# EAGLE board babelbabel (EAGLE 9.6.2), part 1 of 2
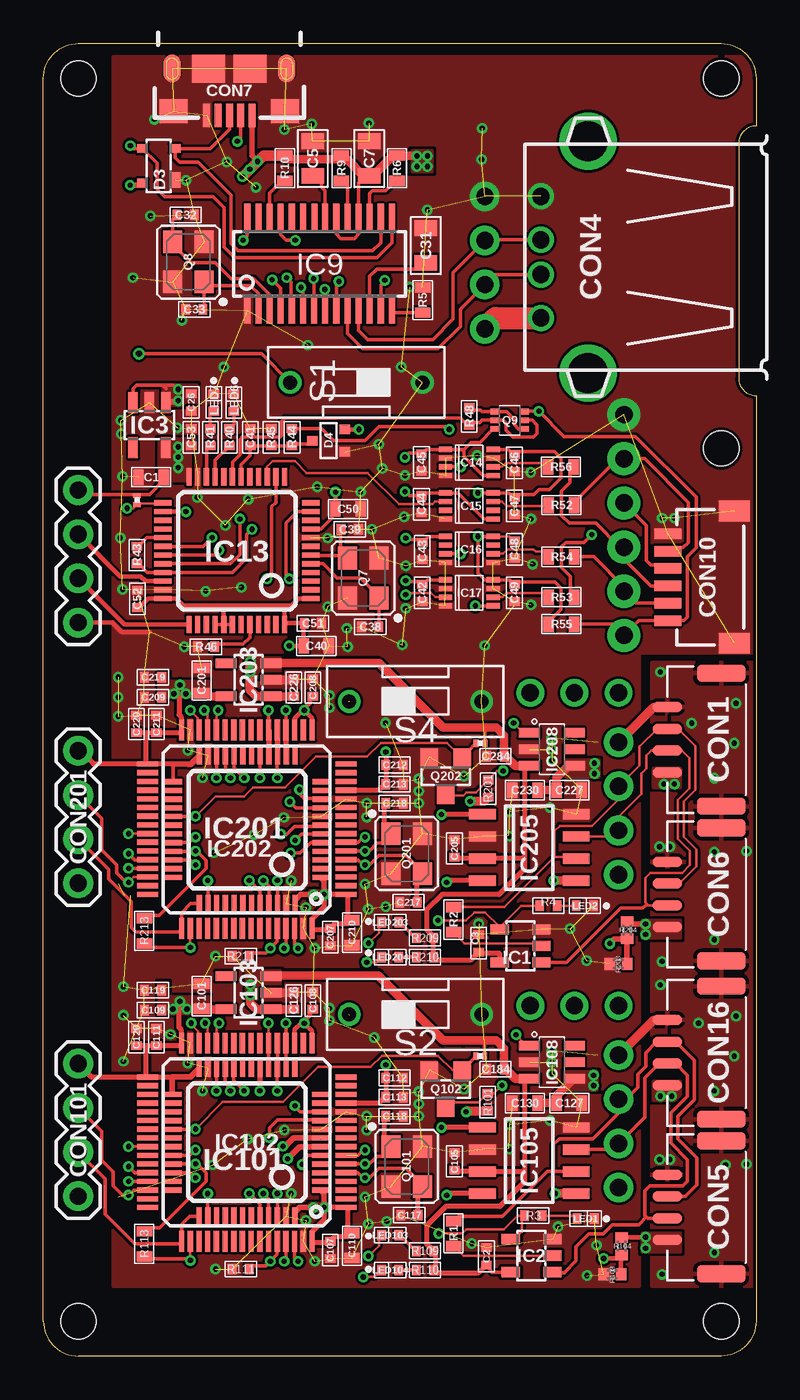
[diagram p0: board, top side]
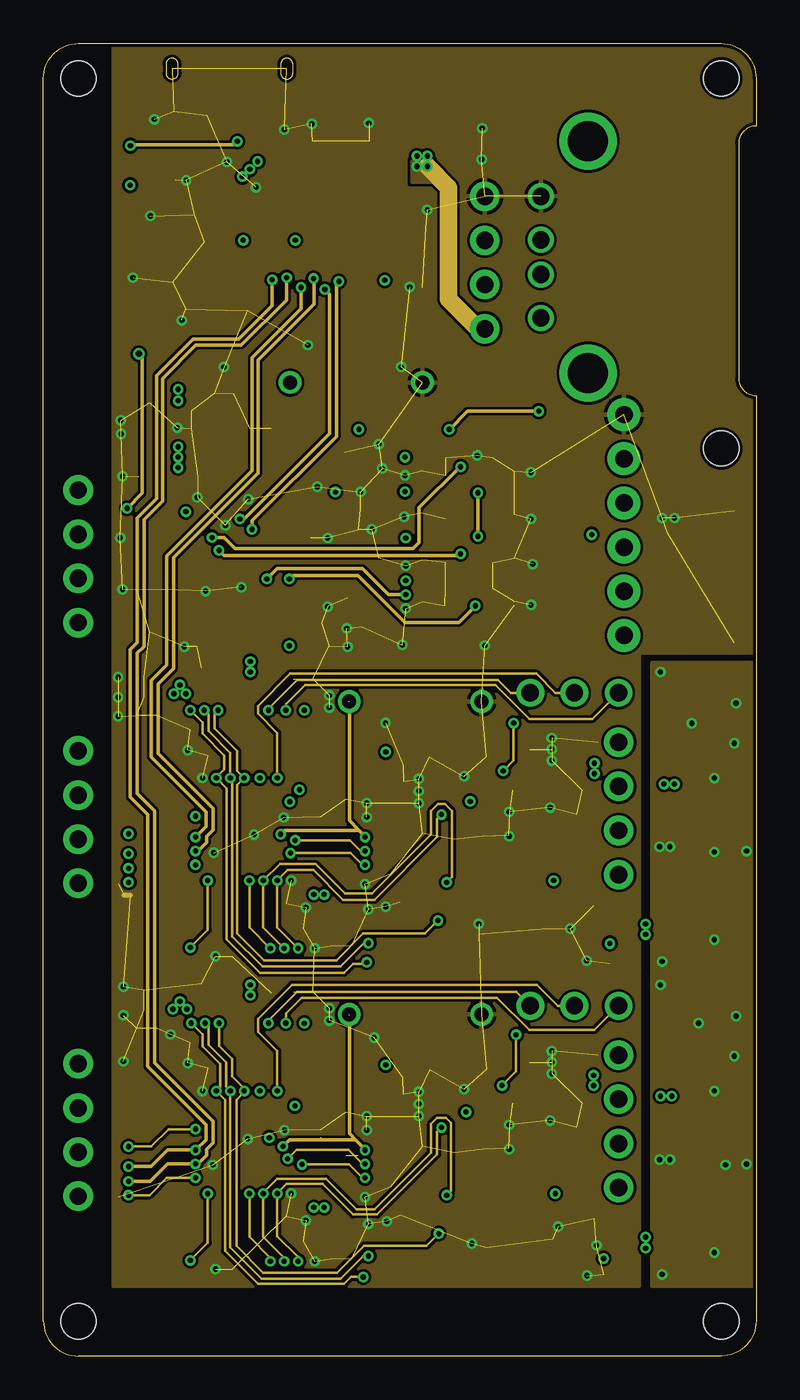
[diagram p1: board, inner layer Route2]
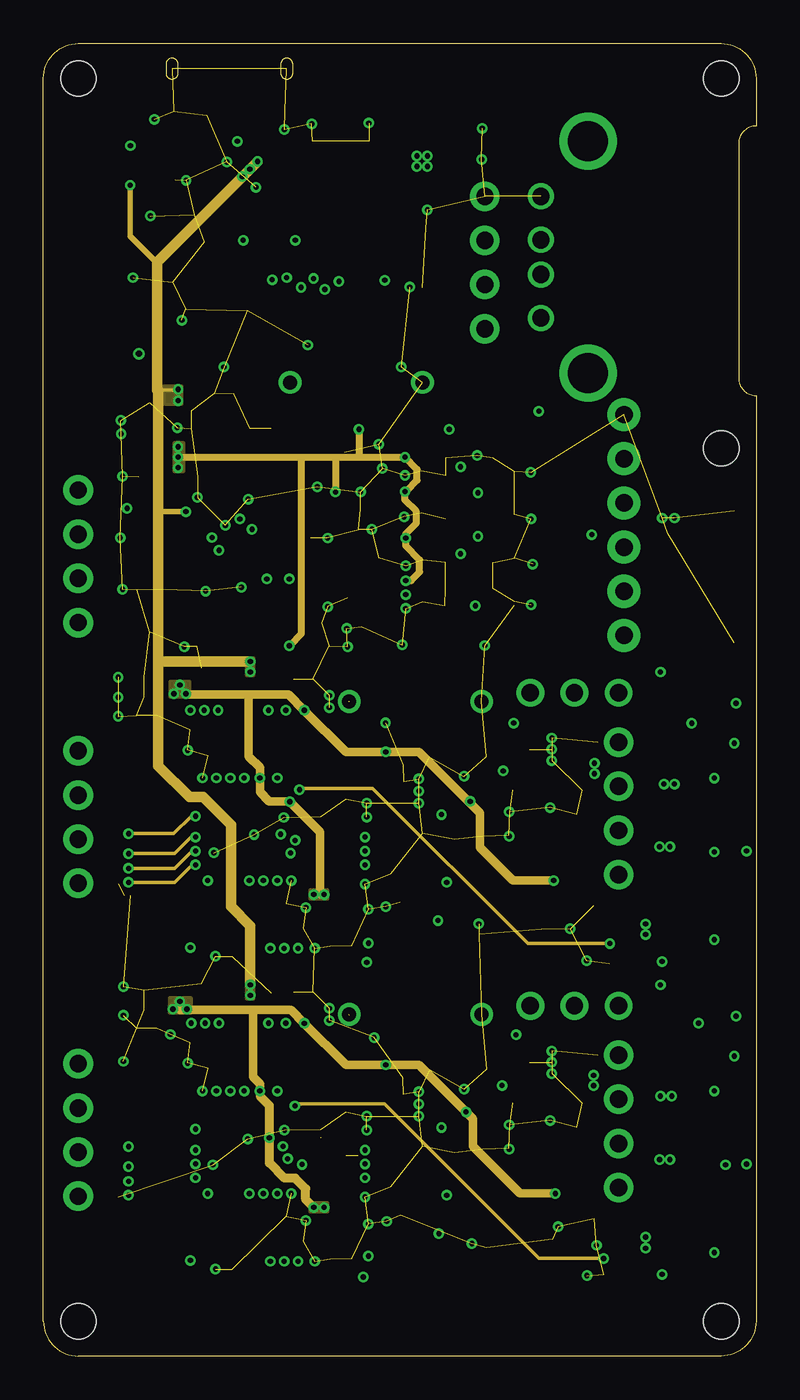
[diagram p2: board, inner layer Route15]
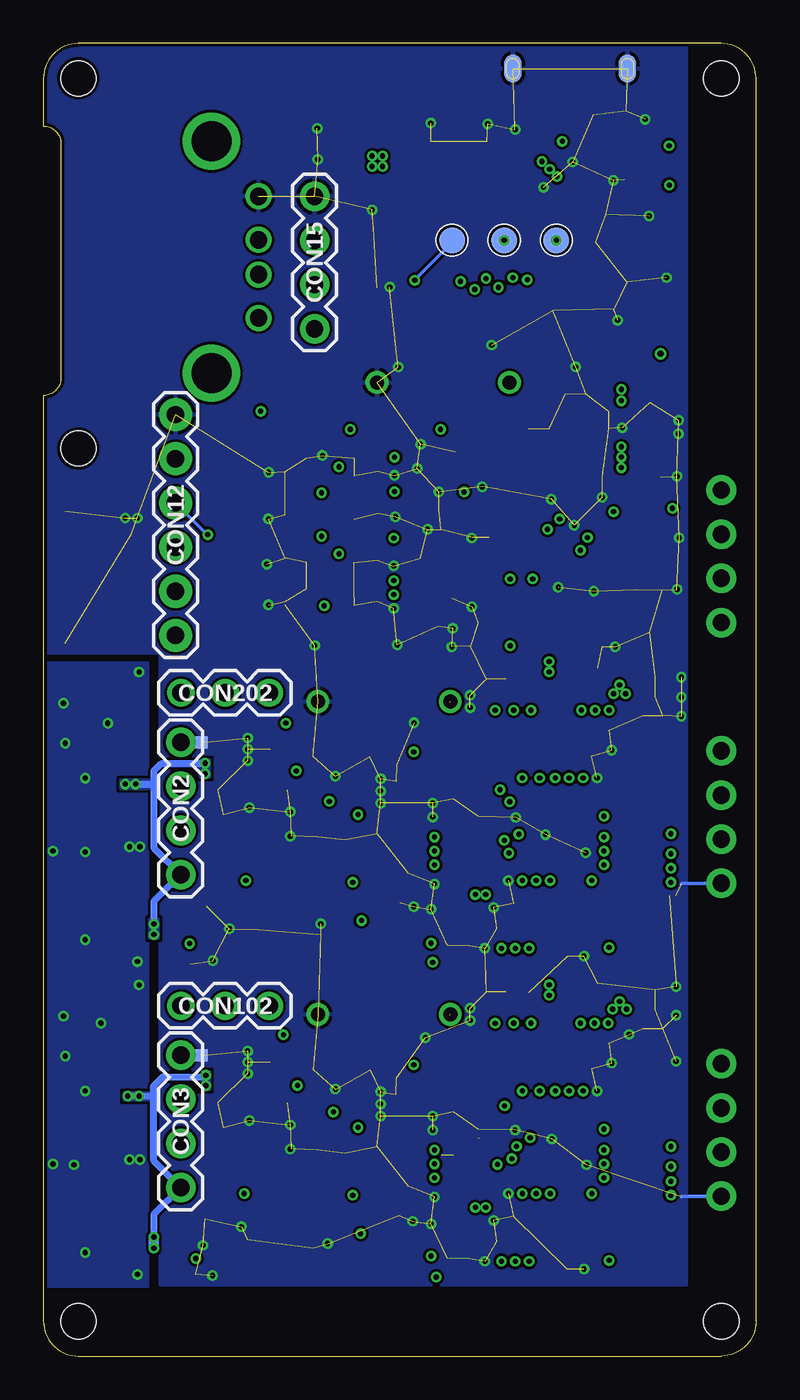
[diagram p3: board, bottom side, seen from below]

Size 41 x 75.5 mm. Coordinates in mm from the lower left corner, seen from the top.
Outline: 0,2 0,73.5 arc-90 2,75.5 39,75.5 arc-90 41,73.5 41,70.75 arc90 40,69.75 40,56.25 arc90 41,55.25 41,2 arc-90 39,0 2,0 arc-90 0,2
Copper layers (1+2*15+16): Top 0.035mm / dielectric 0.12mm / Route2 0.035mm / dielectric 0.7mm / Route15 0.035mm / dielectric 0.12mm / Bottom 0.035mm
Design rules "JLPCB *": minimum track width 0.15mm, minimum drill 0.15mm, track to track 0.15mm, track to pad 0.15mm, pad to pad 0.15mm, via to via 0.15mm, smd to smd 0.15mm, copper to edge 0.2mm, drill to drill 0.3mm, minimum pad ring 0.15mm, minimum via ring 0.15mm, stop-mask expansion 1mil, vias tented up to drill 0.41mm, thermal gap 8mil
Net classes: 1 usb: width 0.2 mm, drill 0.3 mm, clearance 0.2 mm
Holes 2 mm at 2,73.5 39,73.5 39,2 2,2 39,52.2
tRestrict: 2 lines

## Footprints (pad centres in the part's own frame; a part is rotated, then mirrored left to right if it is on the bottom)
C0603 = smd 0.6 x 0.9: 1 -0.725,0; 2 0.725,0
C0402 = smd 0.5 x 0.6: 1 -0.5,0; 2 0.5,0
C0805 = smd 0.9 x 1.3: 1 -1,0; 2 1,0
JST_GH-4P-RA = smd 0.6 x 1.7: 1 1.875,-2.91; 2 0.625,-2.91; 3 -0.625,-2.91; 4 -1.875,-2.91 | smd 1 x 2.8: M$0 -3.825,0.19; M$1 3.825,0.19
1X04-PTH-2.54 = drill 1 pad 1.7: 1 -3.81,0; 2 -1.27,0; 3 1.27,0; 4 3.81,0
USB-A-F-PTH = drill 1: D+ 1,5.37; D- -1,5.37; GND 3.5,5.37; VBUS -3.5,5.37 | drill 2.286: P$1 -6.67,2.66; P$2 6.67,2.66
MICRO_USB_PEGS = smd 0.4 x 1.35: D+ 0,2.68; D- -0.65,2.68; GND 1.3,2.68; ID 0.65,2.68; VBUS -1.3,2.68 | smd 1.9 x 1.6: GND1 -1.2,0; GND2 1.2,0 | smd 1.6 x 1.4: GND3 -3.2,2.45; GND4 3.2,2.45 | smd 1 x 1.6: P$1 -3.3,0; P$2 3.3,0 | smd 1 x 1.6 bottom: P$3 -3.3,0; P$4 3.3,0
SM06B = smd 0.6 x 1.55: 1 -2.5,2.275; 2 -1.5,2.275; 3 -0.5,2.275; 4 0.5,2.275; 5 1.5,2.275; 6 2.5,2.275 | smd 1.2 x 1.8: G1 -3.8,-1.55; G2 3.8,-1.55
1X06-PTH-2.54 = drill 1 pad 1.9: 1 -6.35,0; 2 -3.81,0; 3 -1.27,0; 4 1.27,0; 5 3.81,0; 6 6.35,0
1X03-PTH-2.54 = drill 1 pad 1.6: 1 -2.54,0; 2 0,0; 3 2.54,0
SOT143B = smd 0.6 x 0.9: 1 -0.95,0.8 | smd 0.6 x 0.5: 2 -0.95,-1; 3 0.95,-1; 4 0.95,1
SC70 = smd 0.55 x 0.6: 1 -0.65,-0.925; 2 0.65,-0.925; 3 0,0.925
SOT23-5L = smd 1.1 x 0.6: 1 1.2,-0.95; 2 1.2,0; 3 1.2,0.95; 4 -1.2,0.95; 5 -1.2,-0.95
SOT23-5 = smd 1.2 x 0.55: 1 1.3,-0.95; 2 1.3,0; 3 1.3,0.95; 4 -1.3,0.95; 5 -1.3,-0.95
SSOP-28 = smd 0.35 x 1.5: 1 -4.16,-2.7; 2 -3.52,-2.7; 3 -2.88,-2.7; 4 -2.24,-2.7; 5 -1.6,-2.7; 6 -0.96,-2.7; 7 -0.32,-2.7; 8 0.32,-2.7; 9 0.96,-2.7; 10 1.6,-2.7; 11 2.24,-2.7; 12 2.88,-2.7; 13 3.52,-2.7; 14 4.16,-2.7; 15 4.16,2.7; 16 3.52,2.7; 17 2.88,2.7; 18 2.24,2.7; 19 1.6,2.7; 20 0.96,2.7; 21 0.32,2.7; 22 -0.3,2.7; 23 -0.96,2.7; 24 -1.6,2.7; 25 -2.24,2.7; 26 -2.88,2.7; 27 -3.52,2.7; 28 -4.16,2.7
LQFP48 = smd 1 x 0.3: 1 -4.25,2.75; 2 -4.25,2.25; 3 -4.25,1.75; 4 -4.25,1.25; 5 -4.25,0.75; 6 -4.25,0.25; 7 -4.25,-0.25; 8 -4.25,-0.75; 9 -4.25,-1.25; 10 -4.25,-1.75; 11 -4.25,-2.25; 12 -4.25,-2.75; 25 4.25,-2.75; 26 4.25,-2.25; 27 4.25,-1.75; 28 4.25,-1.25; 29 4.25,-0.75; 30 4.25,-0.25; 31 4.25,0.25; 32 4.25,0.75; 33 4.25,1.25; 34 4.25,1.75; 35 4.25,2.25; 36 4.25,2.75 | smd 0.3 x 1: 13 -2.75,-4.25; 14 -2.25,-4.25; 15 -1.75,-4.25; 16 -1.25,-4.25; 17 -0.75,-4.25; 18 -0.25,-4.25; 19 0.25,-4.25; 20 0.75,-4.25; 21 1.25,-4.25; 22 1.75,-4.25; 23 2.25,-4.25; 24 2.75,-4.25; 37 2.75,4.25; 38 2.25,4.25; 39 1.75,4.25; 40 1.25,4.25; 41 0.75,4.25; 42 0.25,4.25; 43 -0.25,4.25; 44 -0.75,4.25; 45 -1.25,4.25; 46 -1.75,4.25; 47 -2.25,4.25; 48 -2.75,4.25
VSSOP8 = smd 0.75 x 0.3: 1 -1.375,0.75; 2 -1.375,0.25; 3 -1.375,-0.25; 4 -1.375,-0.75; 5 1.375,-0.75; 6 1.375,-0.25; 7 1.375,0.25; 8 1.375,0.75
TQFP64 = smd 0.3 x 1.2: 1 -3.75,-5.7; 2 -3.25,-5.7; 3 -2.75,-5.7; 4 -2.25,-5.7; 5 -1.75,-5.7; 6 -1.25,-5.7; 7 -0.75,-5.7; 8 -0.25,-5.7; 9 0.25,-5.7; 10 0.75,-5.7; 11 1.25,-5.7; 12 1.75,-5.7; 13 2.25,-5.7; 14 2.75,-5.7; 15 3.25,-5.7; 16 3.75,-5.7; 33 3.75,5.7; 34 3.25,5.7; 35 2.75,5.7; 36 2.25,5.7; 37 1.75,5.7; 38 1.25,5.7; 39 0.75,5.7; 40 0.25,5.7; 41 -0.25,5.7; 42 -0.75,5.7; 43 -1.25,5.7; 44 -1.75,5.7; 45 -2.25,5.7; 46 -2.75,5.7; 47 -3.25,5.7; 48 -3.75,5.7 | smd 1.2 x 0.3: 17 5.7,-3.75; 18 5.7,-3.25; 19 5.7,-2.75; 20 5.7,-2.25; 21 5.7,-1.75; 22 5.7,-1.25; 23 5.7,-0.75; 24 5.7,-0.25; 25 5.7,0.25; 26 5.7,0.75; 27 5.7,1.25; 28 5.7,1.75; 29 5.7,2.25; 30 5.7,2.75; 31 5.7,3.25; 32 5.7,3.75; 49 -5.7,3.75; 50 -5.7,3.25; 51 -5.7,2.75; 52 -5.7,2.25; 53 -5.7,1.75; 54 -5.7,1.25; 55 -5.7,0.75; 56 -5.7,0.25; 57 -5.7,-0.25; 58 -5.7,-0.75; 59 -5.7,-1.25; 60 -5.7,-1.75; 61 -5.7,-2.25; 62 -5.7,-2.75; 63 -5.7,-3.25; 64 -5.7,-3.75
SOIC8 = smd 1.55 x 0.6: 1 -2.7,1.905; 2 -2.7,0.635; 3 -2.7,-0.635; 4 -2.7,-1.905; 5 2.7,-1.905; 6 2.7,-0.635; 7 2.7,0.635; 8 2.7,1.905
SOT26 = smd 1.2 x 0.55: 1 -1.3,0.95; 2 -1.3,0; 3 -1.3,-0.95; 4 1.3,-0.95; 5 1.3,0; 6 1.3,0.95
CONNECTION = smd 0.7 x 0.7: P$1 -0.35,0; P$2 0.35,0
LED0402 = smd 0.5 x 0.6: A -0.5,0; C 0.5,0
2х2 = smd 1.5 x 1.5: P$1 0,0
OSCILLATOR-3.2X2.5-4P = smd 1.3 x 1.1: 1 -1.15,-0.9; 2 1.15,-0.9; 3 1.15,0.9; 4 -1.15,0.9
SOT-563 = smd 0.5 x 0.325: 1 -0.85,0.5; 2 -0.85,0; 3 -0.85,-0.5; 4 0.85,-0.5; 5 0.85,0; 6 0.85,0.5
SOT23 = smd 1 x 1: 1 1.1,-0.95; 2 1.1,0.95; 3 -1.1,0
R0603 = smd 0.6 x 0.9: 1 -0.725,0; 2 0.725,0
R0402 = smd 0.5 x 0.6: 1 -0.5,0; 2 0.5,0
R0201 = smd 0.28 x 0.43: 1 -0.255,0; 2 0.255,0
R0402' = smd 0.6 x 0.7: 1 -0.5,0; 2 0.5,0
DS-01 = drill 0.8 pad 1.3: 1 0,-3.81; 10 0,3.81

## Placement (x,y rotation side)
C1  4.7uF  [C0603]  6.2,50.55 0 top
C2  0.1uF  [C0402]  25.49,5.74 270 top
C3  0.1uF  [C0402]  25.05,23.74 270 top
C5  10uF  [C0805]  15.49,68.88 270 top
C7  10uF  [C0805]  18.74,68.88 270 top
C26  1uF  [C0402]  8.5,54.85 90 top
C31  10uF  [C0805]  22,63.88 270 top
C32  20pF  [C0402]  8.18,65.64 180 top
C33  20pF  [C0402]  8.68,60.21 0 top
C38  10pF  [C0402]  18.8,41.95 180 top
C39  10pF  [C0402]  17.62,47.55 0 top
C40  4.7uF  [C0603]  15.7,40.85 0 top
C41  0.1uF  [C0402]  11.9,52.85 270 top
C42  0.1uF  [C0402]  21.8,43.9 270 top
C43  0.1uF  [C0402]  21.8,46.3 270 top
C44  0.1uF  [C0402]  21.75,49 270 top
C45  0.1uF  [C0402]  21.75,51.4 270 top
C46  0.1uF  [C0402]  27.1,51.38 90 top
C47  0.1uF  [C0402]  27.1,48.9 90 top
C48  0.1uF  [C0402]  27.1,46.4 90 top
C49  0.1uF  [C0402]  27.1,43.9 90 top
C50  4.7uF  [C0603]  17.52,48.73 180 top
C51  0.1uF  [C0402]  15.5,42.15 0 top
C52  0.1uF  [C0402]  5.4,43.55 270 top
C53  0.1uF  [C0402]  8.5,52.85 90 top
C101  4.7uF  [C0603]  9.1,20.7 270 top
C105  0.1uF  [C0402]  23.65,11.2 270 top
C107  0.1uF  [C0402]  16.5,6.1 270 top
C108  0.1uF  [C0402]  15.5,20.45 90 top
C109  10nF  [C0402]  6.3,19.9 0 top
C110  4.7uF  [C0603]  17.75,6.35 270 top
C111  10nF  [C0402]  6.5,18.35 270 top
C112  1uF  [C0402]  20.2,16 180 top
C113  10nF  [C0402]  20.2,14.9 180 top
C117  20pF  [C0402]  21.05,8.1 0 top
C118  20pF  [C0402]  20.2,13.8 180 top
C119  1uF  [C0402]  6.3,21.05 0 top
C120  1uF  [C0402]  5.35,18.35 270 top
C126  1uF  [C0402]  14.4,20.45 270 top
C127  4.7uF  [C0603]  30.25,14.55 180 top
C130  4.7uF  [C0603]  27.7,14.55 0 top
C184  0.1uF  [C0402]  26,16.5 180 top
C201  4.7uF  [C0603]  9.1,38.85 270 top
C205  0.1uF  [C0402]  23.65,29.2 270 top
C207  0.1uF  [C0402]  16.5,24.1 270 top
C208  0.1uF  [C0402]  15.5,38.45 90 top
C209  10nF  [C0402]  6.3,37.9 0 top
C210  4.7uF  [C0603]  17.75,24.35 270 top
C211  10nF  [C0402]  6.5,36.35 270 top
C212  1uF  [C0402]  20.2,34 180 top
C213  10nF  [C0402]  20.2,32.9 180 top
C217  20pF  [C0402]  21,26.1 0 top
C218  20pF  [C0402]  20.2,31.8 180 top
C219  1uF  [C0402]  6.3,39.05 0 top
C220  1uF  [C0402]  5.35,36.35 270 top
C226  1uF  [C0402]  14.4,38.45 270 top
C227  4.7uF  [C0603]  30.25,32.55 180 top
C230  4.7uF  [C0603]  27.7,32.55 0 top
C284  0.1uF  [C0402]  26,34.5 180 top
CON1  CON-4P-TABS-JST_GH-RA  [JST_GH-4P-RA]  38.8,35.45 270 top
CON2  PINHEAD_1X04-2.54  [1X04-PTH-2.54]  33.1,31.5 90 bottom
CON3  PINHEAD_1X04-2.54  [1X04-PTH-2.54]  33.1,13.5 90 bottom
CON4  USB-AA-PTH  [USB-A-F-PTH]  33.99,63.21 90 top
CON5  CON-4P-TABS-JST_GH-RA  [JST_GH-4P-RA]  38.8,8.55 270 top
CON6  CON-4P-TABS-JST_GH-RA  [JST_GH-4P-RA]  38.8,26.55 270 top
CON7  USB-1  [MICRO_USB_PEGS]  10.7,74.05 180 top
CON10  CON-6P-SM06B  [SM06B]  38.2,44.8 90 top
CON11  PINHEAD_1X04-2.54  [1X04-PTH-2.54]  2,46 90 top
CON12  PINHEAD_1X06-2.54  [1X06-PTH-2.54]  33.4,47.8 90 bottom
CON15  PINHEAD_1X04-2.54  [1X04-PTH-2.54]  25.4,62.9 90 bottom
CON16  CON-4P-TABS-JST_GH-RA  [JST_GH-4P-RA]  38.8,17.45 270 top
CON101  PINHEAD_1X04-2.54  [1X04-PTH-2.54]  2,13 90 top  (not fitted)
CON102  PINHEAD_1X03-2.54  [1X03-PTH-2.54]  30.55,20.15 180 bottom  (not fitted)
CON201  PINHEAD_1X04-2.54  [1X04-PTH-2.54]  2,31 90 top  (not fitted)
CON202  PINHEAD_1X03-2.54  [1X03-PTH-2.54]  30.55,38.15 180 bottom  (not fitted)
D3  PRTR5V0U2X  [SOT143B]  6.63,68.46 180 top
D4  BAT54SWT1G  [SC70]  16.4,52.65 90 top
IC1  NS5B1G385  [SOT23-5L]  27.45,23.59 0 top
IC2  NS5B1G385  [SOT23-5L]  28.08,5.77 0 top
IC3  AP2127-3.3  [SOT23-5]  6.1,53.55 90 top
IC9  FE1.1S  [SSOP-28]  15.89,62.83 0 top
IC13  STM32F103CBT7  [LQFP48]  11.12,46.33 180 top
IC14  74LVC2T45  [VSSOP8]  24.5,51.4 0 top
IC15  74LVC2T45  [VSSOP8]  24.5,48.9 0 top
IC16  74LVC2T45  [VSSOP8]  24.5,46.4 0 top
IC17  74LVC2T45  [VSSOP8]  24.5,43.9 0 top
IC101  STM32F373CBT6-LQFP48  [LQFP48]  11.71,12.3 180 top
IC102  STM32F373RCT6  [TQFP64]  11.7,12.3 90 top  (not fitted)
IC103  AP2127-3.3  [SOT23-5]  11.8,20.9 0 top
IC105  TJA1051-SO8  [SOIC8]  27.95,11.25 0 top
IC108  TPD3S014DBVR-SOT23-6  [SOT26]  29.25,16.9 0 top
IC201  STM32F373CBT6-LQFP48  [LQFP48]  11.72,30.28 180 top
IC202  STM32F373RCT6  [TQFP64]  11.7,30.3 90 top  (not fitted)
IC203  AP2127-3.3  [SOT23-5]  11.8,38.9 0 top
IC205  TJA1051-SO8  [SOIC8]  27.95,29.25 0 top
IC208  TPD3S014DBVR-SOT23-6  [SOT26]  29.25,34.9 0 top
J1  CONNECTION-SMD  [CONNECTION]  32.25,17.3 180 bottom
J2  CONNECTION-SMD  [CONNECTION]  32.25,35.3 180 bottom
LED1  LED-0402  [LED0402]  31.2,7.9 0 top
LED2  LED-0402  [LED0402]  31.15,25.9 0 top
LED6  LED-0402  [LED0402]  10.96,54.84 90 top
LED7  LED-0402  [LED0402]  9.81,54.85 90 top
LED103  LED-0402  [LED0402]  19.95,6.95 180 top
LED104  LED-0402  [LED0402]  19.95,4.95 180 top
LED203  LED-0402  [LED0402]  19.95,24.95 180 top
LED204  LED-0402  [LED0402]  19.95,22.95 180 top
PAD1  PAD-S_2X2  [2х2]  17.49,64.18 270 bottom
PAD2  PAD-S_2X2  [2х2]  11.49,64.18 270 bottom
PAD4  PAD-S_2X2  [2х2]  14.49,64.18 270 bottom
Q7  8MHz  [OSCILLATOR-3.2X2.5-4P]  18.4,44.75 90 top
Q8  12MHz  [OSCILLATOR-3.2X2.5-4P]  8.34,62.93 90 top
Q9  NTZD3152PT1G  [SOT-563]  26.82,53.83 0 top
Q101  16MHz  [OSCILLATOR-3.2X2.5-4P]  20.9,10.9 270 top
Q102  2N7002  [SOT23]  23.15,15.35 90 top
Q201  16MHz  [OSCILLATOR-3.2X2.5-4P]  20.9,28.9 270 top
Q202  2N7002  [SOT23]  23.15,33.35 90 top
R1  120R  [R0603]  23.6,7.05 90 top
R2  120R  [R0603]  23.6,25.1 90 top
R3  1K  [R0402]  28.18,8.08 180 top
R4  1K  [R0402]  29.05,25.9 180 top
R5  2.7K  [R0603]  21.82,60.74 270 top
R6  100K  [R0603]  20.34,68.33 90 top
R8  10k  [R0201]  5.39,49.24 90 top
R9  100K  [R0603]  17.14,68.33 90 top
R10  100K  [R0603]  13.89,68.33 90 top
R40  1K  [R0402]  10.7,52.85 270 top
R41  1K  [R0402]  9.6,52.85 270 top
R43  1K5  [R0402]  5.38,46.08 270 top
R44  4K7  [R0402]  14.3,52.85 90 top
R45  10K  [R0402]  13.1,52.85 270 top
R46  10K  [R0402]  9.35,40.8 180 top
R48  10K  [R0402]  24.5,54.05 270 top
R52  120R  [R0603]  29.8,48.95 0 top
R53  120R  [R0603]  29.8,43.65 0 top
R54  120R  [R0603]  29.8,45.98 0 top
R55  120R  [R0603]  29.8,42.1 0 top
R56  120R  [R0603]  29.77,51.15 0 top
R101  10K  [R0402]  25.56,14.61 270 top
R102  10k  [R0201]  25.13,17.25 0 top
R103  10k  [R0402']  32.73,4.7 180 top
R104  10k  [R0402']  33.26,6.32 270 top
R109  1K  [R0402]  21.95,6.05 0 top
R110  1K  [R0402]  21.95,4.95 0 top
R111  10K  [R0402]  11.35,5 0 top
R113  1K5  [R0603]  5.8,6.45 270 top
R201  10K  [R0402]  25.58,32.64 270 top
R202  10k  [R0201]  25.14,35.25 0 top
R203  10k  [R0402']  33.07,22.56 180 top
R204  10k  [R0402']  33.58,24.5 270 top
R209  1K  [R0402]  21.95,24.05 0 top
R210  1K  [R0402]  21.95,22.95 0 top
R211  10K  [R0402]  11.35,23 0 top
R213  1K5  [R0603]  5.8,24.45 270 top
S1  DS01-STRAIGHT  [DS-01]  18,56 90 top
S2  DS01-STRAIGHT  [DS-01]  21.4,19.65 270 top
S4  DS01-STRAIGHT  [DS-01]  21.4,37.65 270 top

## Library data of the parts
C1 C40 C50 C101 C110 C127 C130 C201 C210 C227 C230 = rc; LCSC#: C19666; PACKAGE: 0603
C2 C3 C41-C49 C51-C53 C105 C107 C108 C184 C205 C207 C208 C284 = rc; LCSC#: C1525; PACKAGE: 0402
C5 C7 C31 = rc; LCSC#: C15850; PACKAGE: 0805
C26 C112 C119 C120 C126 C212 C219 C220 C226 = rc; LCSC#: C52923; PACKAGE: 0402
C32 C33 C117 C118 C217 C218 = rc; LCSC#: C1554; PACKAGE: 0402
C38 C39 = rc; LCSC#: C32949; PACKAGE: 0402
C109 C111 C113 C209 C211 C213 = rc; LCSC#: C15195; PACKAGE: 0402
CON1 CON5 CON6 CON16 = Connectors; AEC-Q: ---; DIGIKEY#: 455-1566-1-ND; LCSC#: C189895; MANF: JST Sales America Inc; MANF#: SM04B-GHS-TB(LF)(SN); OPERATING_TEMP: -25°C ~ 85°C
CON2 CON3 CON11 CON12 CON15 CON101 CON102 CON201 CON202 = pinhead
CON4 = Connectors; DIGIKEY#: 2092-KUSBX-AS1N-W-ND; MANF: Kycon, Inc.; MANF#: KUSBX-AS1N-W
CON7 = Connectors; DIGIKEY#: 609-4616-1-ND; LCSC#: C132562; MANF: FCI; MANF#: 10118193-0001LF
CON10 = Connectors; DIGIKEY#: 455-1806-1-ND; LCSC#: C160405; MANF: JST Sales America Inc; MANF#: SM06B-SRSS-TB(LF)(SN)
D3 = TVS_diodes; DIGIKEY#: 568-4140-2-ND; LCSC#: C12333; MANF: NXP USA Inc; MANF#: PRTR5V0U2X,215
D4 = Diodes; LCSC#: C78260; MANF: ON Semiconductor; MANF#: BAT54SWT1G
IC1 IC2 = misc; DIGIKEY#: 1727-6763-1-ND; LCSC#: C554311; MANF: Nexperia USA Inc.; MANF#: 74AHC1G66GV,125
IC3 IC103 IC203 = linear regulators; DIGIKEY#: AP2127K-3.3TRG1DITR-ND; I_MAX: 300mA; LCSC#: C156285; MANF: Diodes Incorporated; MANF#: AP2127K-3.3TRG1; V_MAX: 6V
IC9 = misc; LCSC#: C9359; MANF: Terminus Tech; MANF#: FE1.1S
IC13 = stm32; DIGIKEY#: 497-11518-ND; LCSC#: C8304; MANF: STMicroelectronics; MANF#: STM32F103CBT7
IC14-IC17 = misc; ALTERNATIVE: 74LVC2T45DC-Q100H; DIGIKEY#: 1727-4578-2-ND; LCSC#: C139382; MANF: Nexperia USA Inc; MANF#: 74LVC2T45DC,125
IC101 IC201 = stm32; DIGIKEY#: 497-13309-ND; MANF: STMicroelectronics; MANF#: STM32F373CBT6
IC102 IC202 = stm32; DIGIKEY#: 497-13252-ND; LCSC#: C84174; MANF: STMicroelectronics; MANF#: STM32F373RCT6
IC105 IC205 = serial_interfaces; DIGIKEY#: 568-8684-2-ND; LCSC#: C38695; MANF: NXP USA Inc; MANF#: TJA1051T/3,118
IC108 IC208 = misc; DIGIKEY#: 296-38835-1-ND; LCSC#: C87384; MANF: Texas Instruments; MANF#: TPD3S014DBVR
J1 J2 = misc; BOM: EXCLUDE
LED1 LED2 LED7 LED103 LED203 = rc; COLOR: RED; LCSC#: C74339
LED6 LED104 LED204 = rc; COLOR: GREEN; LCSC#: C74338
PAD1 PAD2 PAD4 = PADS; BOM: EXCLUDE
Q7 = crystal; LCSC#: C133366; LOAD_CAPACITANCE: 10pF
Q8 = crystal; LCSC#: C9002; LOAD_CAPACITANCE: 20pF
Q9 = mosfet; DIGIKEY#: NTZD3152PT1GOSCT-ND; LCSC#: C393372; MANF: ON Semiconductor; MANF#: NTZD3152PT1G; PACKAGE: SOT-563
Q101 Q201 = crystal; LCSC#: C164049; LOAD_CAPACITANCE: 20pF
Q102 Q202 = mosfet; LCSC#: C8545; MANF: Changjiang Electronics Tech (CJ); MANF#: 2N7002; PACKAGE: SOT23
R1 R2 R52-R56 = rc; LCSC#: C22787; PACKAGE: 0603; TOLERANCE: 1%
R3 R4 R40 R41 R109 R110 R209 R210 = rc; LCSC#: C11702; PACKAGE: 0402; TOLERANCE: 1%
R5 = rc; LCSC#: C13167; PACKAGE: 0603; TOLERANCE: 1%
R6 R9 R10 = rc; LCSC#: C25803; PACKAGE: 0603; TOLERANCE: 1%
R8 R102 R202 = rcl; MANF: YAGEO; MANF#: RC0201FR-0710KL; PACKAGE: 0201; SPICEPREFIX: R
R43 = rc; LCSC#: C25867; PACKAGE: 0402; TOLERANCE: 1%
R44 = rc; LCSC#: C25900; PACKAGE: 0402; TOLERANCE: 1%
R45 R46 R48 R101 R111 R201 R211 = rc; LCSC#: C25744; PACKAGE: 0402; TOLERANCE: 1%
R103 R104 R203 R204 = rcl; MANF: YAGEO; MANF#: RP0402FRE0710KL; PACKAGE: 0402; SPICEPREFIX: R
R113 R213 = rc; MANF: Panasonic; MANF#: ERJ-3EKF1501V; PACKAGE: 0603; TOLERANCE: 1%
S1 S2 S4 = misc; LCSC#: C319063; MANF: XKB Connectivity; MANF#: DS-01RP

## Nets
BABEL1:BOOT0: IC101.44 IC102.60 R111.2
BABEL1:CAN_COMM: IC101.22 IC102.30 LED104.C
BABEL1:CAN_RX: IC101.45 IC102.61 IC105.4
BABEL1:CAN_STATUS: IC101.21 IC102.29 LED103.C
BABEL1:CAN_TX: IC101.46 IC102.62 IC105.1
BABEL1:CAN_VDD_EN: IC101.29 IC102.41 Q102.1 R102.1
BABEL1:N$1: IC108.1 Q102.3 R101.1
BABEL1:N$4: IC101.10 R103.1 R104.2
BABEL1:N$27: LED103.A R109.1
BABEL1:N$28: LED104.A R110.1
BABEL1:PA4: CON102.3 IC101.14 IC102.20
BABEL1:PA5: CON102.2 IC101.15 IC102.21
BABEL1:PA6: CON102.1 IC101.16 IC102.22
BABEL1:PF0: C117.2 IC101.5 IC102.5 Q101.3
BABEL1:PF1: C118.2 IC101.6 IC102.6 Q101.1
BABEL1:SWCLK: CON101.2 IC101.37 IC102.49
BABEL1:SWDIO: CON101.3 IC101.34 IC102.46
BABEL1:USB_PU: IC101.38 IC102.50 R113.2
BABEL1:VDD_3V3: C101.2 C107.1 C108.1 C109.2 C110.1 C111.2 C112.2 C113.2 C119.2 C120.2 CON101.4 IC101.1 IC101.9 IC101.17 IC101.24 IC101.25 IC101.48 IC102.1 IC102.13 IC102.17 IC102.19 IC102.32 IC102.33 IC102.64 IC103.5 IC105.5 R101.2
BABEL1_RST: IC101.7 IC102.7 S2.1
BABEL1_RST1: IC201.7 IC202.7 S4.1
BABEL1_TERM: IC2.4 IC101.20 IC102.28 R3.2
BABEL1_USB_N: IC9.4 IC101.32 IC102.44
BABEL1_USB_P: IC9.5 IC101.33 IC102.45 R113.1
BABEL2:BOOT0: IC201.44 IC202.60 R211.2
BABEL2:CAN_COMM: IC201.22 IC202.30 LED204.C
BABEL2:CAN_RX: IC201.45 IC202.61 IC205.4
BABEL2:CAN_STATUS: IC201.21 IC202.29 LED203.C
BABEL2:CAN_TX: IC201.46 IC202.62 IC205.1
BABEL2:CAN_VDD_EN: IC201.29 IC202.41 Q202.1 R202.1
BABEL2:N$1: IC208.1 Q202.3 R201.1
BABEL2:N$4: IC201.10 R203.1 R204.2
BABEL2:N$27: LED203.A R209.1
BABEL2:N$28: LED204.A R210.1
BABEL2:PA4: CON202.3 IC201.14 IC202.20
BABEL2:PA5: CON202.2 IC201.15 IC202.21
BABEL2:PA6: CON202.1 IC201.16 IC202.22
BABEL2:PF0: C217.2 IC201.5 IC202.5 Q201.3
BABEL2:PF1: C218.2 IC201.6 IC202.6 Q201.1
BABEL2:SWCLK: CON201.2 IC201.37 IC202.49
BABEL2:SWDIO: CON201.3 IC201.34 IC202.46
BABEL2:USB_PU: IC201.38 IC202.50 R213.2
BABEL2:VDD_3V3: C201.2 C207.1 C208.1 C209.2 C210.1 C211.2 C212.2 C213.2 C219.2 C220.2 CON201.4 IC201.1 IC201.9 IC201.17 IC201.24 IC201.25 IC201.48 IC202.1 IC202.13 IC202.17 IC202.19 IC202.32 IC202.33 IC202.64 IC203.5 IC205.5 R201.2
BABEL2_TERM: IC1.4 IC201.20 IC202.28 R4.2
BABEL2_USB_N: IC9.6 IC201.32 IC202.44
BABEL2_USB_P: IC9.7 IC201.33 IC202.45 R213.1
CAN1_VDD: C127.2 C130.2 CON3.1 CON5.1 CON16.1 IC108.4 R104.1
CAN1_VDD1: C227.2 C230.2 CON1.1 CON2.1 CON6.1 IC208.4 R204.1
CAN_L: IC2.2 R1.1
CANH1: CON3.2 CON5.2 CON16.2 IC2.1 IC105.7
CANH2: CON1.2 CON2.2 CON6.2 IC1.1 IC205.7
CANL1: CON3.3 CON5.3 CON16.3 IC105.6 R1.2
CANL2: CON1.3 CON2.3 CON6.3 IC205.6 R2.2
CONSOLE_RX: CON10.3 CON12.3 R56.2
CONSOLE_TX: CON10.2 CON12.2 R54.2
DCP_DM: IC9.8 IC13.32
DCP_DP: IC9.9 IC13.33 R43.2
DUT_DM: CON4.D- CON15.2 IC9.10
DUT_DP: CON4.D+ CON15.3 IC9.11
GND: C1.1 C2.1 C3.1 C5.1 C7.1 C26.1 C31.1 C32.1 C33.1 C38.2 C39.2 C40.2 C41.1 C42.2 C43.2 C44.2 C45.2 C46.1 C47.1 C48.1 C49.1 C50.1 C51.2 C52.1 C53.2 C101.1 C105.1 C107.2 C108.2 C109.1 C110.2 C111.1 C112.1 C113.1 C117.1 C118.1 C119.1 C120.1 C126.1 C127.1 C130.1 C184.2 C201.1 C205.1 C207.2 C208.2 C209.1 C210.2 C211.1 C212.1 C213.1 C217.1 C218.1 C219.1 C220.1 C226.1 C227.1 C230.1 C284.2 CON4.GND CON7.GND CON7.GND1 CON7.GND2 CON7.GND3 CON7.GND4 CON7.P$1 CON7.P$2 CON7.P$3 CON7.P$4 CON10.6 CON10.G1 CON10.G2 CON11.1 CON12.6 CON15.4 CON101.1 CON201.1 D3.1 D4.1 IC1.3 IC2.3 IC3.2 IC9.1 IC13.8 IC13.23 IC13.35 IC14.2 IC14.4 IC14.7 IC15.4 IC16.4 IC16.5 IC17.2 IC17.4 IC17.7 IC101.8 IC101.23 IC101.47 IC102.12 IC102.31 IC102.63 IC103.2 IC105.2 IC105.8 IC108.2 IC201.8 IC201.23 IC201.47 IC202.12 IC202.31 IC202.63 IC203.2 IC205.2 IC205.8 IC208.2 J1.P$1 J2.P$1 LED1.C LED2.C LED6.C LED7.C Q7.2 Q7.4 Q8.2 Q8.4 Q101.2 Q101.4 Q102.2 Q201.2 Q201.4 Q202.2 R5.1 R45.1 R46.2 R103.2 R111.1 R203.2 R211.1 S1.1 S2.10 S4.10
GNDD: CON1.4 CON1.M$0 CON1.M$1 CON2.4 CON3.4 CON5.4 CON5.M$0 CON5.M$1 CON6.4 CON6.M$0 CON6.M$1 CON16.4 CON16.M$0 CON16.M$1 J1.P$2 J2.P$2
IRXD: IC13.31 IC16.3
ITCK: IC13.15 IC15.2
ITMS: IC13.14 IC17.3
ITMS_DIR: IC13.11 IC17.5
ITXD: IC13.30 IC14.3
LED1: IC13.21 R40.2
LED2: IC13.22 R41.2
N$1: LED1.A R3.1
N$2: IC1.2 R2.1
N$3: LED2.A R4.1
N$9: C31.2 IC9.12
N$10: IC9.14 R5.2
N$14: C33.2 IC9.2 Q8.1
N$16: C32.2 IC9.3 Q8.3
N$17: CON7.D+ D3.2 IC9.16
N$18: CON7.D- D3.3 IC9.15
N$19: IC9.26 R10.1
N$24: C5.2 IC9.21
N$25: IC9.17 R6.1
N$26: IC9.19 R9.1
N$27: IC9.25 PAD4.P$1
N$29: IC9.13 PAD1.P$1
N$30: IC9.28 PAD2.P$1
N$37: C38.1 IC13.5 Q7.1
N$38: C39.1 IC13.6 Q7.3
N$39: LED6.A R40.1
N$40: LED7.A R41.1
N$42: IC13.29 R43.1
N$43: IC13.44 R46.1
N$44: Q9.1 Q9.4 R48.1
PWR_BR: IC13.19 Q9.2 Q9.5 R48.2
SWCLK: CON11.2 IC13.37
SWDIO: CON11.3 IC13.34
SWITCH: IC13.25 R8.1 S1.10
TCK: CON10.5 CON12.5 R52.2
TMS: CON10.4 CON12.4 R53.2
TPWR: CON10.1 CON12.1 Q9.6 R44.2 R55.2
VBUS3: C41.2 D4.3 IC13.18 R44.1 R45.2
VDD_3V3: C1.2 C40.1 C42.1 C43.1 C44.1 C45.1 C50.2 C51.1 C52.2 C53.1 CON11.4 D4.2 IC3.5 IC13.1 IC13.9 IC13.24 IC13.36 IC13.40 IC13.41 IC13.42 IC13.48 IC14.1 IC14.5 IC15.1 IC15.5 IC16.1 IC17.1 Q9.3 R8.2
VDD_5V: C2.2 C3.2 C7.2 C26.2 C105.2 C126.2 C184.1 C205.2 C226.2 C284.1 CON4.VBUS CON7.VBUS CON15.1 D3.4 IC1.5 IC2.5 IC3.1 IC3.3 IC9.18 IC9.20 IC13.26 IC103.1 IC103.3 IC105.3 IC108.3 IC203.1 IC203.3 IC205.3 IC208.3 R6.2 R9.2 R10.2 R102.2 R109.2 R110.2 R202.2 R209.2 R210.2
XRXD: IC16.6 R54.1
XTCK: IC15.7 R52.1
XTMS: IC17.6 R53.1
XTPWR: C46.2 C47.2 C48.2 C49.2 IC14.8 IC15.8 IC16.8 IC17.8 R55.1
XTXD: IC14.6 R56.1